# Altium PCB Kicker.PcbDoc
Units mm, origin at the board's own origin, x right, y up, seen from the top; angles counter-clockwise.
Board outline 172 x 133.17 mm, 2 copper layers (Top Layer, Bottom Layer), stack 1.671 mm thick; 52 components, 31 nets, 190 pads, 210 vias.
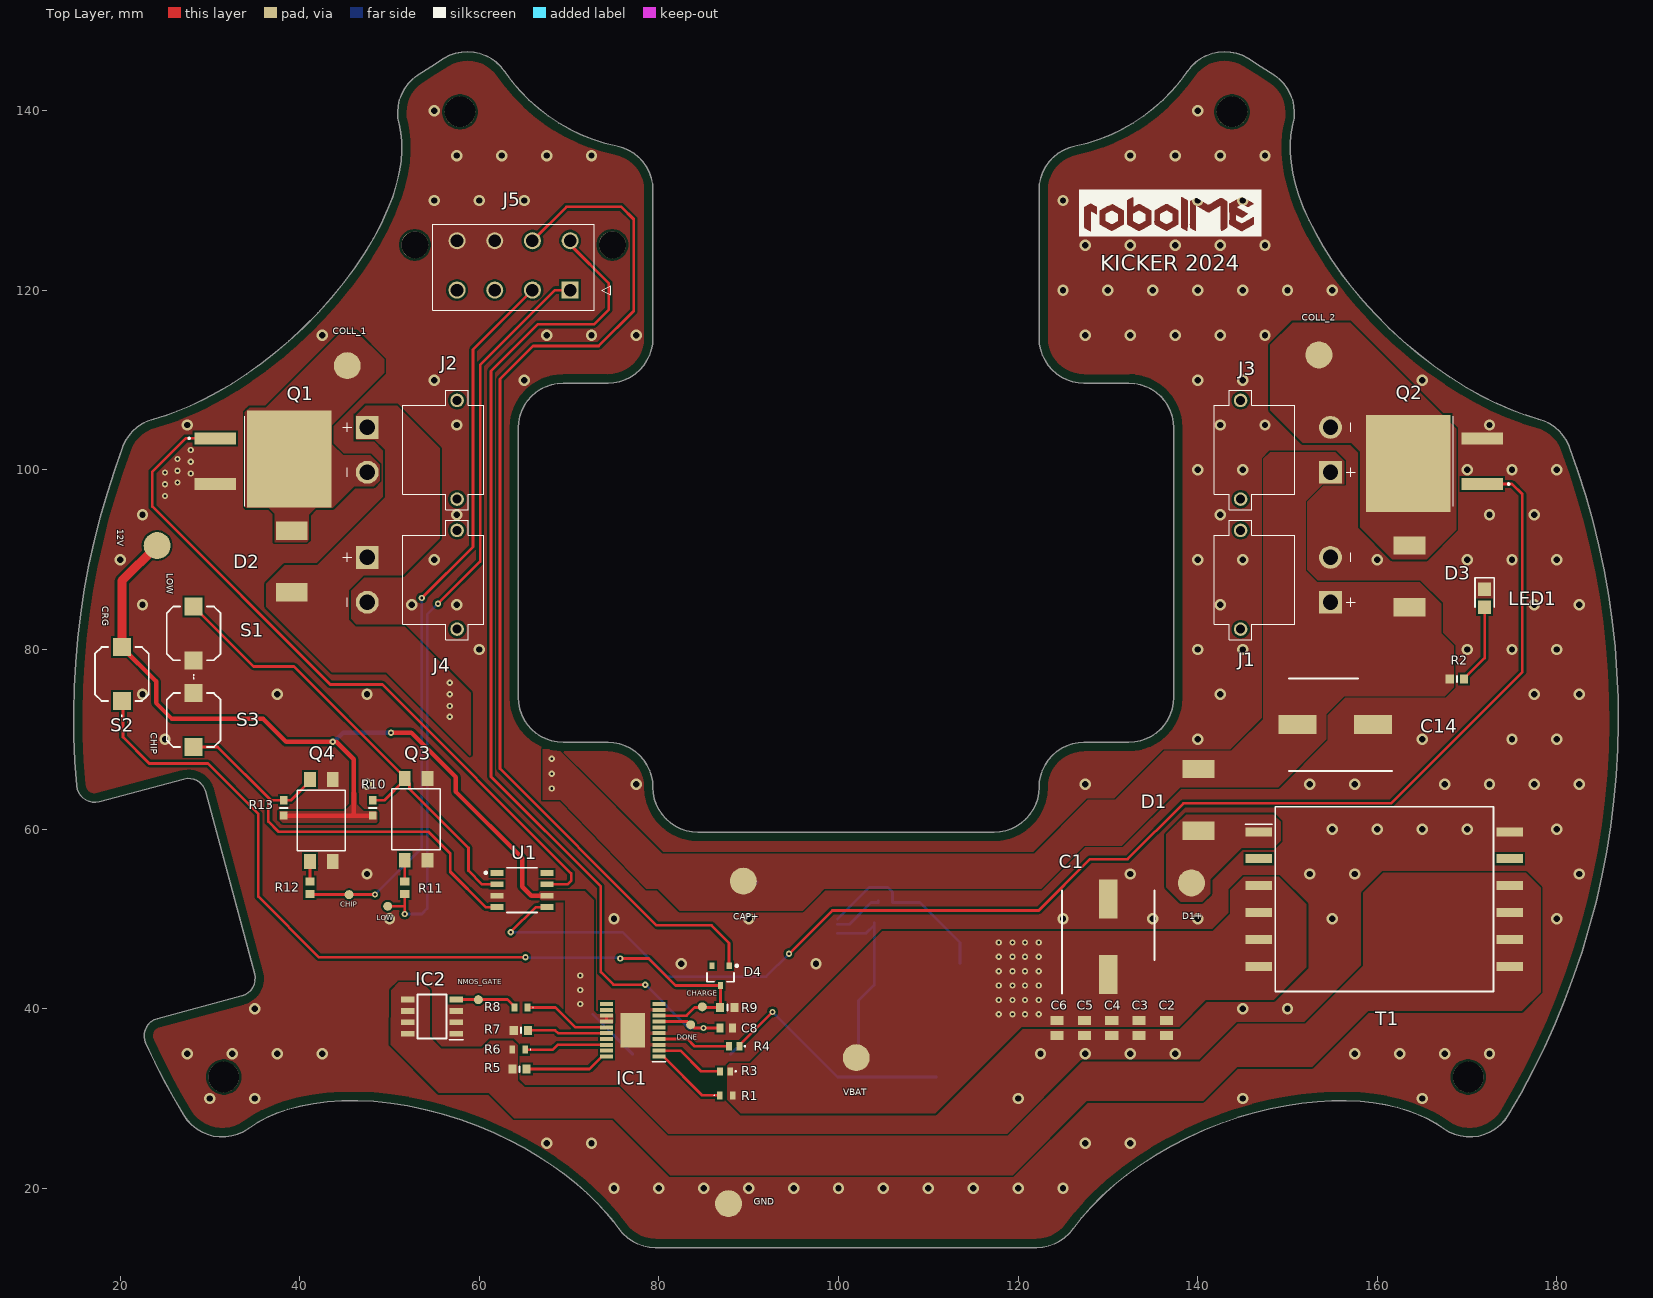
[diagram p0: Top Layer view]
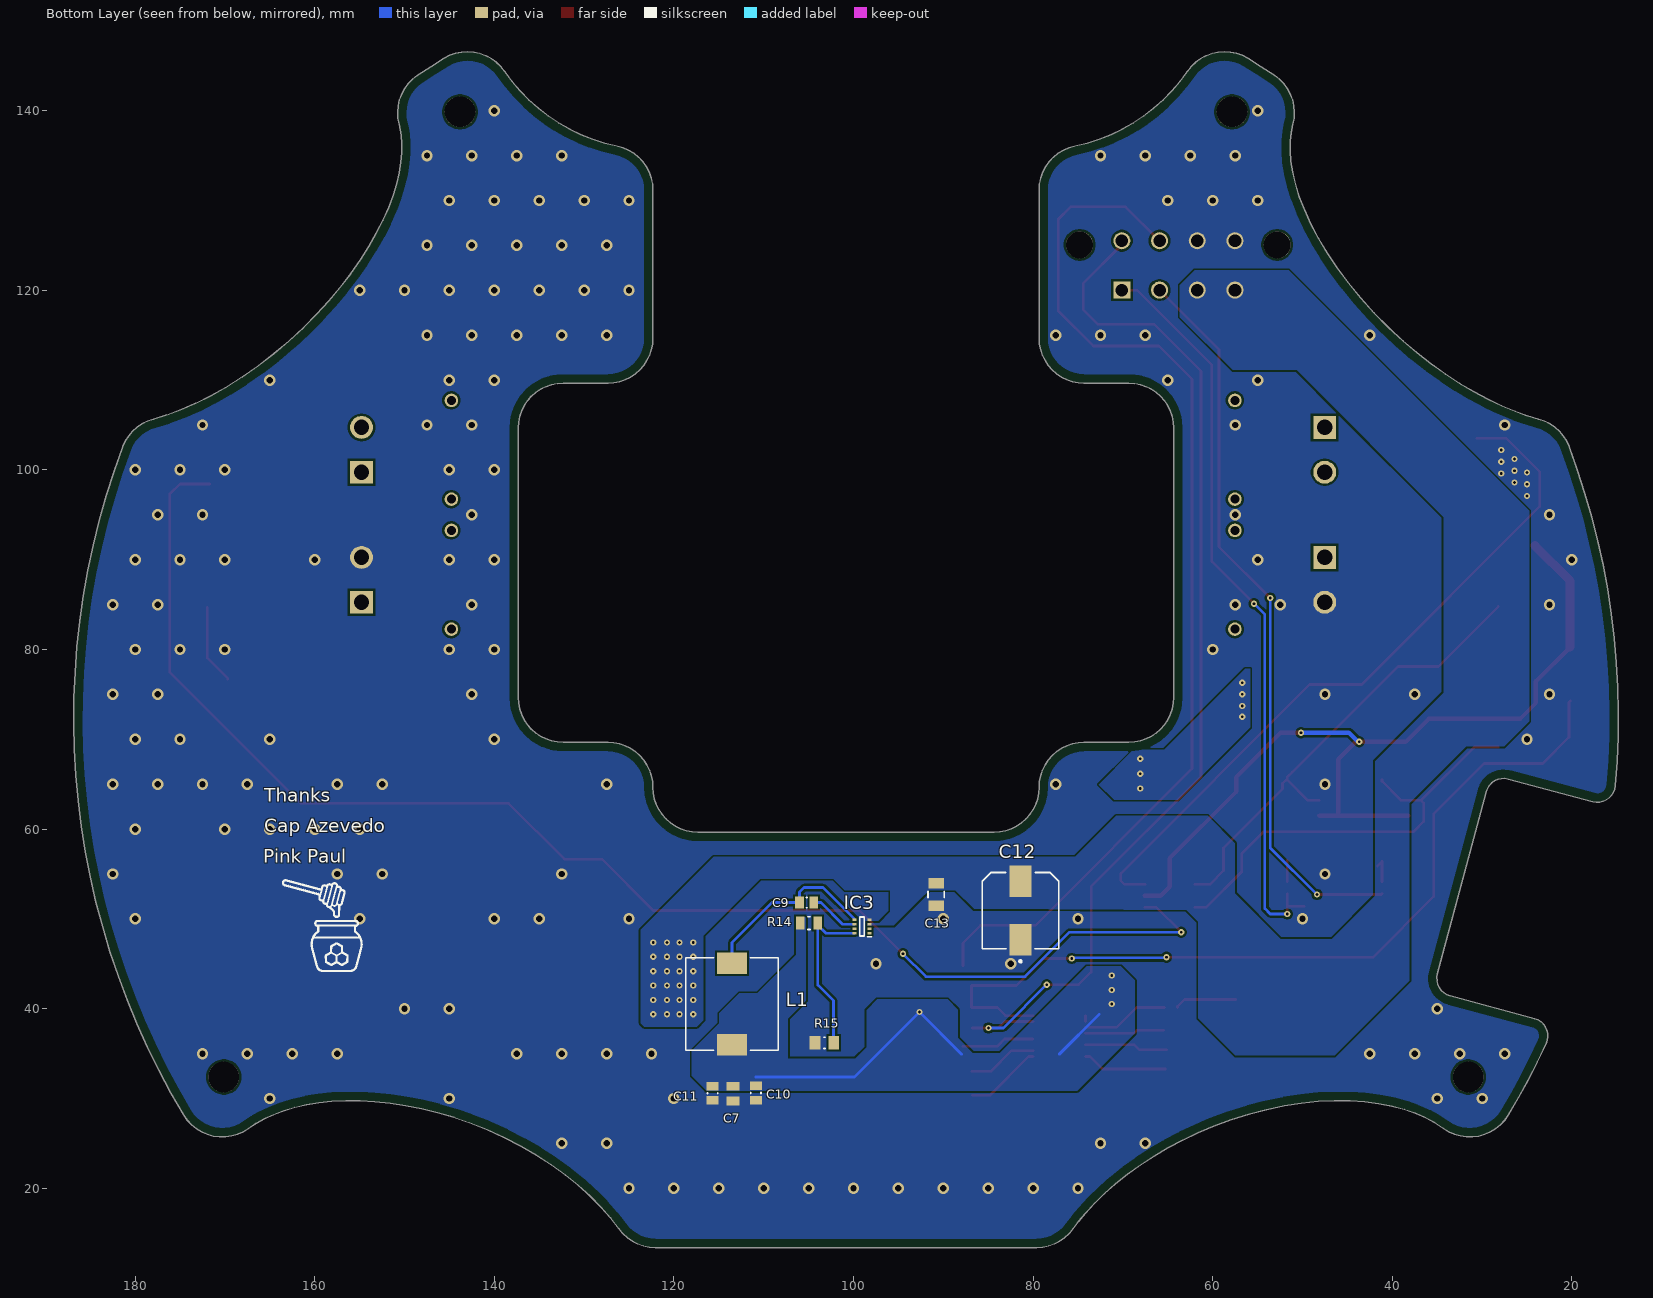
[diagram p1: Bottom Layer view, seen from below]
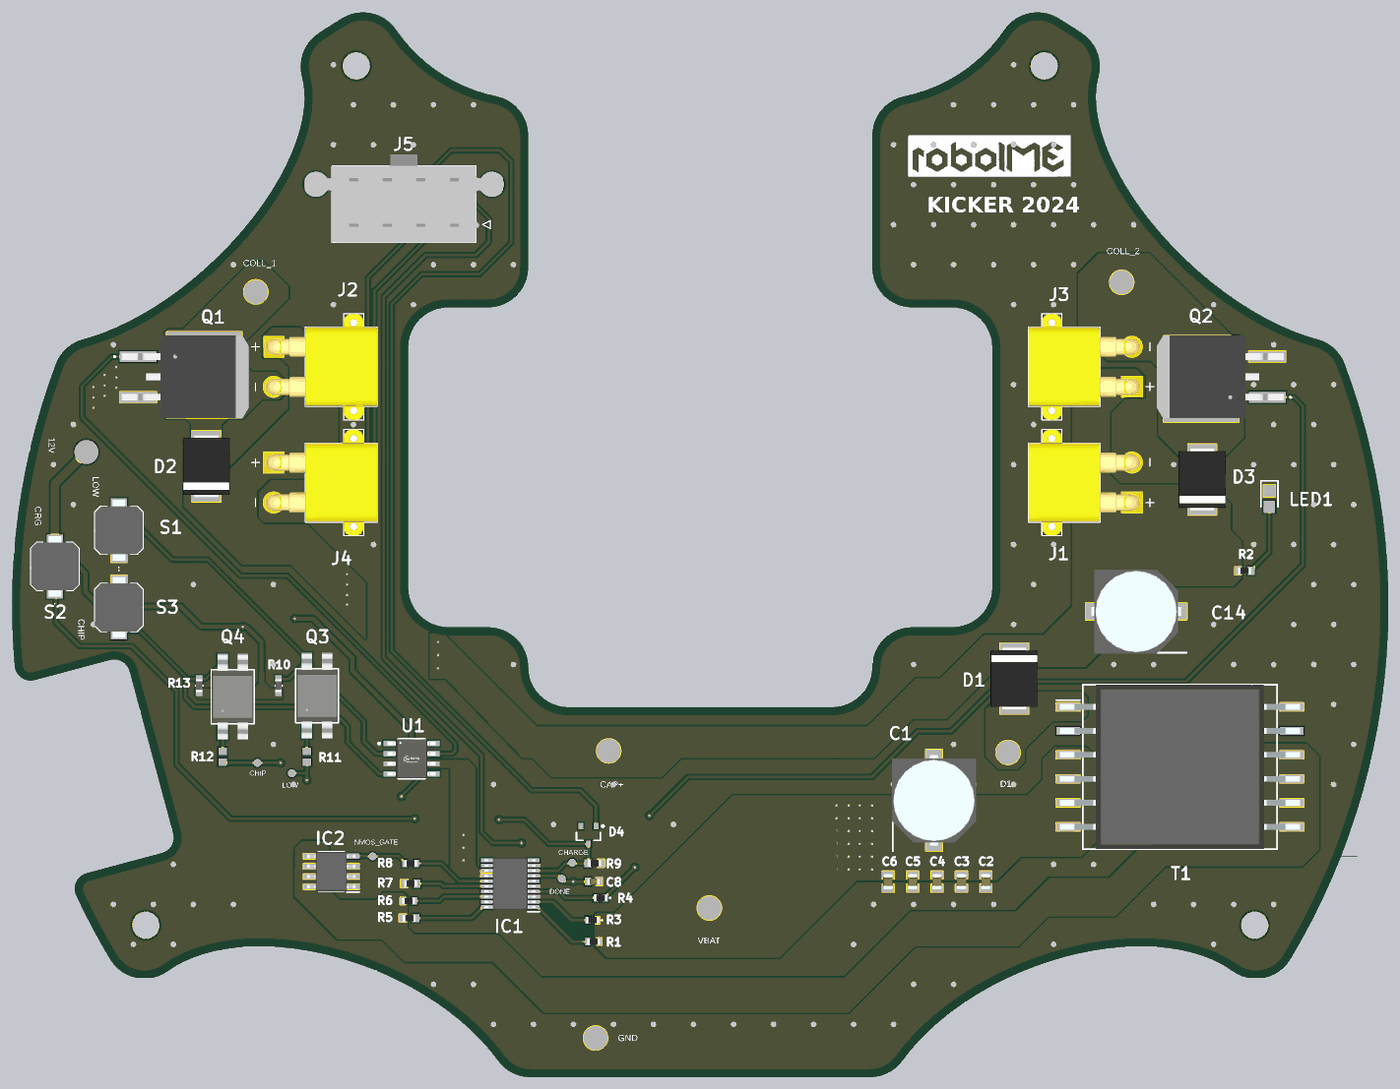
[diagram p2: 3D render of the assembled board from above, using the file's embedded part models]
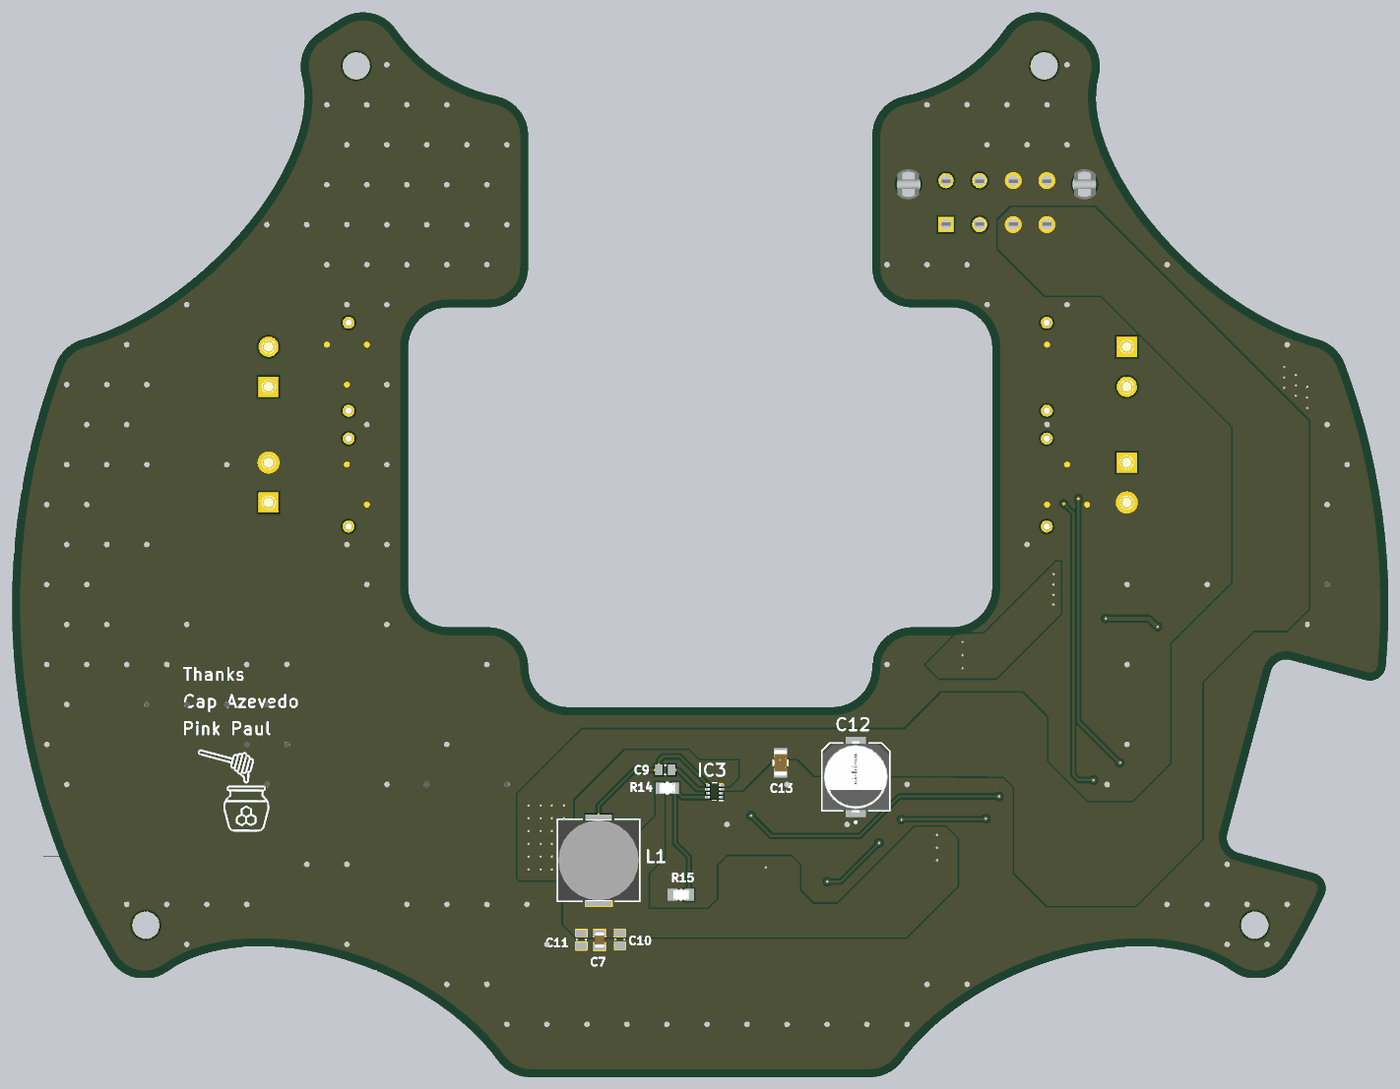
[diagram p3: 3D render of the assembled board from below, using the file's embedded part models]

## Layer stack, top to bottom
Top Solder: solder mask 0.0102, Solder Resist, Dk 3.5
Top Layer: signal copper 0.0356
Dielectric 1: dielectric 1.6, FR-4, Dk 4.8
Bottom Layer: signal copper 0.0356
Bottom Solder: solder mask 0.0102, Solder Resist, Dk 3.5

## Board outline
462 vertices, not listed, extent 14.84,13.39 186.835,146.562

## Design rules (kind name [scope] priority, off if disabled: settings)
BoardOutlineClearance [All] p1: gap=1 ignorepadtopadclearanceinfootprint=FALSE
Clearance Clearance_HV [InNetClass('HV')] p1: gap=1.5 ignorepadtopadclearanceinfootprint=FALSE except(0.2: Arc-SMDPad Track-SMDPad SMDPad-SMDPad SMDPad-Text)
Clearance Clearance_1 [OnMid vs OnMid] p2: gap=0.254 ignorepadtopadclearanceinfootprint=FALSE except(0.1: Arc-SMDPad Track-SMDPad SMDPad-SMDPad; 0.2: SMDPad-Fill SMDPad-Poly SMDPad-Region Fill-Fill Fill-Poly Fill-Region Poly-Poly Poly-Region Region-Region)
Clearance Clearance_2 [(ExistsOnLayer('Top Layer') Or ExistsOnLayer('Bottom Layer')) vs (ExistsOnLayer('Top Layer') Or ExistsOnLayer('Bottom Layer'))] p3: gap=0.254 ignorepadtopadclearanceinfootprint=FALSE except(0.1: Arc-SMDPad Track-SMDPad SMDPad-SMDPad; 0.2: SMDPad-Fill SMDPad-Poly SMDPad-Region Fill-Fill Fill-Poly Fill-Region Poly-Poly Poly-Region Region-Region)
Clearance [All] p4: gap=0.254 ignorepadtopadclearanceinfootprint=FALSE except(0.1: Arc-SMDPad Track-SMDPad SMDPad-SMDPad; 0.2: SMDPad-Fill SMDPad-Poly SMDPad-Region Fill-Fill Fill-Poly Fill-Region Poly-Poly Poly-Region Region-Region)
HoleSize [All] p1 off: absolutevalues=TRUE maxlimit=2.54 minlimit=0.025 maxpercent=80.000 minpercent=20.000
MinimumSolderMaskSliver [All] p1: minsoldermaskwidth=0.2
PlaneClearance [All] p1: clearance=0.3
PolygonConnect [All] p1: connectstyle=Direct reliefconductorwidth=0.254 reliefentries=4 polygonreliefangle="90 Angle" airgapwidth=0.254
RoutingVias [All] p1: holewidth=0.7 width=0.7 viastyle="Through Hole" minholewidth=0.3 minwidth=0.3 maxholewidth=5 maxwidth=1
SilkToSolderMaskClearance [IsPad] p1: minsilkscreentomaskgap=0.1 clearancetoexposedcopper=TRUE
SolderMaskExpansion SolderMaskExpansion_via [IsVia] p1: expansion=0.102 istentingtop=TRUE useseparateexpansions=TRUE expansionbottom=0.102 istentingbottom=TRUE
SolderMaskExpansion [All] p2: expansion=0.102 istentingtop=FALSE
Width [All] p1: maxlimit=5 minlimit=0.1 preferedwidth=0.3 minimp=50.000000 maximp=50.000000 favimp=50.000000
26 further rules are at their usual default settings.

## Components (designator, comment, footprint, x,y, rotation, side; value= is the part's Value field where it differs from the comment)
C1 "220uF" CAPAE1030X1050N 130.048,48.006 r90 top
C2 "10uF" CAPC2012X145N 136.525,37.846 r270 top
C3 "10uF" CAPC2012X145N 133.477,37.846 r270 top
C4 "10uF" CAPC2012X145N 130.429,37.846 r270 top
C5 "10uF" CAPC2012X145N 127.381,37.846 r270 top
C6 "10uF" CAPC2012X145N 124.333,37.846 r270 top
C7 "10uF" CAPC2012X145N 113.411,30.545 r90 bottom
C8 "100nF" CAPC1608X95N 87.503,37.846 r180 top
C9 "100nF" CAPC0805(2012)155_L 105.216,51.816 r180 bottom value=10uF
C10 "10uF" CAPC0805(2012)155_L 110.871,30.607 r90 bottom
C11 "4.7uF" CAPC0805(2012)155_L 115.697,30.585 r90 bottom value=10uF
C12 "UWT1H101MNL1GS" FP-UWT1H101MNL1GS-MFG 81.407,50.927 r90 bottom value=100uF
C13 "GMK316AB7106KL-TR" FP-1206-L_3_2_0_2-W_1_6_0-IPC_C 90.805,52.705 r270 bottom value=10uF
C14 "AEF1016220M250R" CAPAE1030X1700N 155.312,71.628 r180 top
D1 "ES3J" Diode 140.081,63.246 r270 top
D2 "ES3J" Diode 39.116,89.789 r90 top
D3 "ES3J" Diode 163.576,88.138 r90 top
D4 "BAS40" INF-SOT23_L 86.868,43.688 r270 top
IC1 "LT3751EFETRPBF" SOP65P640X120-21N 77.089,37.592 r180 top
IC2 "FDS2582" SOIC127P600X175-8N 54.737,39.116 r180 top
IC3 "TPS563300DRLR" SOTFL50P160X60-8N 99.06,49.149 r0 bottom
J1 "XT30PW-M" AMASS_XT30PW-M 144.78,87.757 r90 top
J2 "XT30PW-M" AMASS_XT30PW-M 57.531,102.235 r270 top
J3 "XT30PW-M" AMASS_XT30PW-M 144.78,102.235 r90 top
J4 "XT30PW-M" AMASS_XT30PW-M 57.531,87.757 r270 top
J5 "172447-0608" 172447-YY08 70.122,120.015 r0 top
L1 "SRU1048-120Y" INDP100100X51N 113.538,40.513 r270 bottom
LED1 "SM0805HCL" LEDC2012X105N 171.958,85.709 r270 top
Q1 "IKB40N65ES5ATMA1" BTS141TCBUMA1 35.687,100.965 r270 top
Q2 "IKB40N65ES5ATMA1" BTS141TCBUMA1 166.624,100.965 r90 top
Q3 "HCPL-817-300E" HCPL-817-300 52.959,61.087 r90 top
Q4 "HCPL-817-300E" HCPL-817-300 42.418,60.96 r90 top
R1 "24K9" ERJS03J155V 87.503,30.353 r0 top
R2 "100K" RESC1608X55N 168.872,76.708 r180 top
R3 "133k" ERJUP3 87.376,33.02 r180 top
R4 "133k" ERJUP3 88.392,35.814 r180 top
R5 "10K" RESC1608X55N 64.478,33.274 r180 top
R6 "24K9" ERJS03J155V 64.389,35.433 r180 top
R7 "1K" RESC1608X55N 64.643,37.592 r180 top
R8 "24K9" ERJS03J155V 64.643,40.132 r180 top
R9 "10K" RESC1608X55N 87.63,40.132 r180 top
R10 "RC0603FR-073K3L" FP-RC0603-0_55-MFG 48.133,62.357 r270 top value=3.3kΩ
R11 "CRCW0603442RFKEA" RESC1609X50X30ML10T20 51.689,53.467 r90 top
R12 "CRCW0603442RFKEA" RESC1609X50X30ML10T20 41.148,53.467 r90 top
R13 "RC0603FR-073K3L" FP-RC0603-0_55-MFG 38.227,62.357 r270 top value=3.3kΩ
R14 "140K" FP-CRCW0805-e3-MFG 104.943,49.53 r180 bottom value=30kR
R15 "10K" FP-CRCW0805-e3-IPC_A 103.251,36.195 r0 bottom value=10kR
S1 "430133050816" 430133050816 28.194,81.788 r90 top
S2 "430133050816" 430133050816 20.193,77.264 r90 top
S3 "430133050816" 430133050816 28.194,72.136 r270 top
T1 "DA2034-ALD" SOP300P3000X1143-12N 160.782,52.197 r0 top
U1 "IR4426SPBF" FP-PG-DSO-8-MFG 64.77,53.213 r0 top

## Footprints (in the part's own frame and the unit in brackets; to place one, negate y for a bottom-side part, rotate by r counter-clockwise, add the part's x,y. Pads: shape width x height; smd on the part's side, far side on the other; paste and mask are expansions set on the pad)
172447-YY08 [mm]
  rect 1.9x1.9 hole 1.4: 1(0,0)
  round 1.9 hole 1.4: 2(-4.2,0) 3(-8.4,0) 4(-12.6,0) 5(0,5.5) 6(-4.2,5.5) 7(-8.4,5.5) 8(-12.6,5.5)
  round 3 hole 3 unplated: 9(4.7,5.04) 10(-17.3,5.04)
  silkscreen extent -15.3,-2.25 4.5,7.35, body extent -18.69,-2.25 6.09,8.75, height 12.75
430133050816 [mm]
  rect 2x2 smd: 1(-3,0) 2(3,0)
  silkscreen extent -4.7,-3 3,3, body extent -3.8,-3 3.8,3, height 5.3
AMASS_XT30PW-M [mm]
  round 2.55 hole 1.7: N(2.5,-10)
  rect 2.55x2.55 / inner round 2.55 / far side rect 2.55x2.55 hole 1.7: P(-2.5,-10)
  round 1.508 hole 1: S1(5.5,0) S2(-5.5,0)
  silkscreen extent -6.65,-12.75 6.65,2.95, body extent -6.65,-11 6.65,2.95, height 5
BTS141TCBUMA1 [mm]
  rect 1.35x4.6 smd: 1(-2.54,-5.075) 3(2.54,-5.075)
  rect 10.8x9.4 smd: 2(-0.254,3.175)
  silkscreen extent -5,-8.1 5,-1.83, body extent -5.16,-7.14 5.16,8.74, height 4.57
CAPAE1030X1050N [mm]
  rect 4.3x2.05 smd: 1(-4.2,0) 2(4.2,0)
  silkscreen extent -6.35,-5.15 5.15,5.15, body extent -5.65,-5.25 5.65,5.25, height 10.5
CAPAE1030X1700N [mm]
  rect 4.25x2.1 smd: 1(-4.2,0) 2(4.2,0)
  silkscreen extent -6.32,-5.15 5.15,5.15, body extent -5.6,-5.25 5.6,5.25, height 17
CAPC0805(2012)155_L [mm] "Chip Capacitor, Body 2.0x1.2mm, Height 1.55mm, IPC High Density"
  rect 0.95x1.35 smd: 1(-0.8,0) 2(0.8,0)
  silkscreen extent -0.05,-0.58 0.05,0.58, body extent -1.1,-0.72 1.1,0.72, height 1.55
CAPC1608X95N [mm]
  rect 0.78x0.98 smd: 1(-0.7,0) 2(0.7,0)
  body extent -0.8,-0.4 0.8,0.4, height 0.95
CAPC2012X145N [mm]
  rect 0.97x1.47 smd: 1(-0.83,0) 2(0.83,0)
  body extent -1,-0.63 1,0.63, height 1.45
Diode [mil]
  rect 80x140 smd: D1+(-135,0) D1-(135,0)
  body extent -154,-116 154,116, height 95
ERJS03J155V [mm]
  rect 0.65x0.9 smd: 1(-0.725,0) 2(0.725,0)
  silkscreen extent -1.35,-0.02 -1.3,0.02, body extent -0.8,-0.4 0.8,0.4, height 0.45
ERJUP3 [mm]
  rect 0.65x0.9 smd: 1(-0.575,0) 2(0.575,0)
  silkscreen extent -1.22,-0.05 -1.13,0.05, body extent -0.8,-0.4 0.8,0.4, height 0.55
FP-1206-L_3_2_0_2-W_1_6_0-IPC_C [mm]
  rect 1.204x1.706 smd paste+0 mask+0: 1(-1.251,0) 2(1.251,0)
  silkscreen extent -0.35,-0.9 0.35,0.9, body extent -1.6,-0.8 1.6,0.8, height 1.8
FP-CRCW0805-e3-IPC_A [mil]
  rect 47.5x59.38 smd paste+0 mask+0: 1(-41.37,0) 2(41.37,0)
  silkscreen extent -3,-25 3,25, body extent -39,-25 39,25, height 20
FP-CRCW0805-e3-MFG [mm]
  rect 0.95x1.45 smd paste+0 mask+0: 1(-0.975,0) 2(0.975,0)
  silkscreen extent -0.13,-0.7 0.13,0.7, body extent -1,-0.63 1,0.63, height 0.5
FP-PG-DSO-8-MFG [mm]
  rect 1.45x0.65 smd paste+0 mask+0: 1(-2.775,1.905) 2(-2.775,0.635) 3(-2.775,-0.635) 4(-2.775,-1.905) 5(2.775,-1.905) 6(2.775,-0.635) 7(2.775,0.635) 8(2.775,1.905)
  silkscreen extent -4.17,-2.49 1.67,2.49, body extent -3.6,-2.59 3.6,2.59, height 0.25
FP-RC0603-0_55-MFG [mm]
  rect 0.9x0.8 smd paste+0 mask+0: 1(-0.85,0) 2(0.85,0)
  silkscreen extent 0,-0.45 0,0.45, body extent -1.4,-0.55 1.4,0.55, height 0.25
FP-UWT1H101MNL1GS-MFG [mm]
  rect 3.5x2.5 smd paste+0 mask+0: 1(-3.25,0) 2(3.25,0)
  silkscreen extent -5.77,-4.25 4.25,4.25, body extent -4.45,-4.15 4.45,4.15, height 10.51
HCPL-817-300 [mil]
  rect 65x51 smd paste+0 mask+0: 1(-179.5,50) 2(-179.5,-50) 3(179.5,-50) 4(179.5,50)
  silkscreen extent -133,-106 133,106, body extent -206,-101 206,101, height 171
INDP100100X51N [mm] "Precision Wire Wound Inductor, 2-Leads, Body 10.00x10.00mm, IPC Medium Density"
  rect 2.4x3.3 smd: 1(-4.55,0) 2(4.55,0)
  silkscreen extent -5.15,-5.15 5.15,5.15, body extent -5.1,-5 5.1,5, height 5.2
INF-SOT23_L [mm] "SOT23, 3-Leads, Body 2.9x1.3 mm, Pitch 0.95 mm, IPC High Density"
  rect 0.75x0.6 smd: 1(-1.1,0.95) 2(-1.1,-0.95) 3(1.1,0)
  silkscreen extent -1.22,-1.5 0.7,1.93, body extent -0.7,-1.5 0.7,1.5, height 1.1
LEDC2012X105N [mm]
  rect 1.5x1.45 smd: 1(-1,0) 2(1,0)
  silkscreen extent -2.29,-1.07 1,1.07, body extent -1.65,-0.6 1.65,0.6
RESC1608X55N [mm]
  rect 0.9x1 smd: 1(-0.8,0) 2(0.8,0)
  silkscreen extent 0,-0.33 0,0.33, body extent -0.8,-0.43 0.8,0.43, height 0.55
RESC1609X50X30ML10T20 [mm] "Chip Resistor, 2-Leads, Body 1.55x0.85mm, IPC Low Density"
  rect 0.9x1.05 smd: 1(-0.675,0) 2(0.675,0)
  body extent -0.82,-0.48 0.82,0.48, height 0.5
SOIC127P600X175-8N [mm]
  rect 1.525x0.65 smd: 1(-2.712,1.905) 2(-2.712,0.635) 3(-2.712,-0.635) 4(-2.712,-1.905) 5(2.712,-1.905) 6(2.712,-0.635) 7(2.712,0.635) 8(2.712,1.905)
  silkscreen extent -3.48,-2.45 1.6,2.58, body extent -3,-2.45 3,2.45, height 1.75
SOP65P640X120-21N [mm]
  rect 1.45x0.45 smd: 1(-2.925,2.925) 2(-2.925,2.275) 3(-2.925,1.625) 4(-2.925,0.975) 5(-2.925,0.325) 6(-2.925,-0.325) 7(-2.925,-0.975) 8(-2.925,-1.625) 9(-2.925,-2.275) 10(-2.925,-2.925) 11(2.925,-2.925) 12(2.925,-2.275) 13(2.925,-1.625) 14(2.925,-0.975) 15(2.925,-0.325) 16(2.925,0.325) 17(2.925,0.975) 18(2.925,1.625) 19(2.925,2.275) 20(2.925,2.925)
  rect 2.74x3.86 smd: 21(0,0)
  silkscreen extent -3.65,3.5 -2.2,3.5, body extent -3.2,-3.25 3.2,3.25, height 1.2
SOP300P3000X1143-12N [mm]
  rect 2.95x1 smd: 1(-13.975,7.5) 2(-13.975,4.5) 3(-13.975,1.5) 4(-13.975,-1.5) 5(-13.975,-4.5) 6(-13.975,-7.5) 7(13.975,-7.5) 8(13.975,-4.5) 9(13.975,-1.5) 10(13.975,1.5) 11(13.975,4.5) 12(13.975,7.5)
  silkscreen extent -15.45,-10.29 12.15,10.29, body extent -15,-10.29 15,10.29, height 11.43
SOTFL50P160X60-8N [mm]
  rect 0.475x0.3 smd: 1(-0.838,0.75) 2(-0.838,0.25) 3(-0.838,-0.25) 4(-0.838,-0.75) 5(0.838,-0.75) 6(0.838,-0.25) 7(0.838,0.25) 8(0.838,0.75)
  silkscreen extent -1.07,-1.05 0.25,1.15, body extent -0.8,-1.05 0.8,1.05, height 0.6

## Part data
C1: library part 865080657018, "Capacitor Polarised", Manufacturer_Name="Wurth Elektronik", Mouser Part Number=710-865080657018, Datasheet Link=https://www.we-online.com/catalog/datasheet/865080657018.pdf, Height=10.5mm, Manufacturer_Part_Number=865080657018, Mouser Price/Stock=https://www.mouser.co.uk/ProductDetail/Wurth-Elektronik/865080657018?qs=0KOYDY2FL28CcgHzg1XTuA%3D%3D
C2 C3 C4 C5 C6 C7: library part GRM21BR61H106KE43L, "Capacitor 10u", Manufacturer_Name="Murata Electronics", Mouser Part Number=81-GRM21BR61H106KE3L, Arrow Part Number=GRM21BR61H106KE43L, Arrow Price/Stock=https://www.arrow.com/en/products/grm21br61h106ke43l/murata-manufacturing?region=europe, Datasheet Link=http://www.murata.com/~/media/webrenewal/support/library/catalog/products/capacitor/mlcc/c02e.pdf, Height=1.45mm, Manufacturer_Part_Number=GRM21BR61H106KE43L, Mouser Price/Stock=https://www.mouser.co.uk/ProductDetail/Murata-Electronics/GRM21BR61H106KE43L?qs=lYGu3FyN48cBZlIduWKclg%3D%3D
C8: library part C0603C104K1RACAUTO, "Capacitor", Manufacturer_Name=KEMET, Mouser Part Number=80-C0603C104K1RAUTO, Arrow Part Number=C0603C104K1RACAUTO, Arrow Price/Stock=https://www.arrow.com/en/products/c0603c104k1racauto/kemet-corporation?region=europe, Datasheet Link=https://connect.kemet.com:7667/gateway/IntelliData-ComponentDocumentation/1.0/download/specsheet/C0603C104K1RACAUTO, Height=0.95mm, Manufacturer_Part_Number=C0603C104K1RACAUTO, Mouser Price/Stock=https://www.mouser.co.uk/ProductDetail/KEMET/C0603C104K1RACAUTO?qs=3Rah4i%252BhyCGTQ5uPNXtfZA%3D%3D
C9 C10 C11: library part CMP-1036-04916-1, "CAP 10uF 6.3V ±10% 0805 (2012 Metric) Thickness 1.55mm SMD", Case-EIA=0805, Case-Metric=2012, Rated Voltage="6.3 V", Tolerance=Â±10%, Max Thickness="1.55 mm", Technology=SMT
C12: library part CMP-2000-07373-2, "CAP ALUM 100UF 20% 50V SMD", Capacitance=100uF, Case/Package=Radial, Dielectric Material=Aluminium, Leakage Current=3uA, Max Operating Temperature=105°C, Min Operating Temperature=-55°C, Package Quantity=500, Ripple Current=140mA, Tolerance=20%, Voltage=50V, Construction=Cylindrical, Diameter=8mm, Dissipation Factor=0.14%, Height=10mm, Height - Seated (Max)=0.413inch, Lead Free="Lead Free", Length=10mm, Life (Hours)=1000Hour, Mount="Surface Mount", Number of Pins=2, Packaging="Tape and Reel", Radiation Hardening=No, REACH SVHC="No SVHC", Ripple Current (AC)=140mA, RoHS Compliant=Yes, Series=WT, Termination=SMD/SMT, Voltage Rating=50V, Voltage Rating (DC)=50V
C13: library part CMP-2000-06324-3, "None", Capacitance=10uF, Case Code (Imperial)=1206, Case Code (Metric)=3216, Dielectric=X7R, Max Operating Temperature=125°C, Min Operating Temperature=-55°C, Package Quantity=2000, Resistor Type=Ceramic, Tolerance=10%, Voltage Rating=35V, Case/Package=1206, Height=1.6mm, Length=0.126inch, Mount="Surface Mount", Packaging="Tape and Reel", REACH SVHC="No SVHC", RoHS Compliant=Yes, Series=M, Termination=SMD/SMT, Thickness=0.071inch, Voltage Rating (DC)=35V, Width=1.6mm
C14: "Capacitor", Manufacturer_Name=KYOCERA, Mouser Part Number=581-AEF1016220M250R, Datasheet Link=https://hu.mouser.com/datasheet/2/40/kyocera_avx_aef_series-2933561.pdf, Height=17mm, Manufacturer_Part_Number=AEF1016220M250R, Mouser Price/Stock=https://www.mouser.co.uk/ProductDetail/KYOCERA-AVX/AEF1016220M250R?qs=MyNHzdoqoQJxz8ZnBhkLWA%3D%3D
D4: library part CMP-1182-00023-1, "Silicon Schottky Diode, -55 to 150 degC, SOT23, Reel, Green", Manufacturer=Infineon, ComponentLink1Description="Manufacturer URL", ComponentLink1URL=http://www.infineon.com/, ComponentLink2Description=Datasheet, ComponentLink2URL=http://www.infineon.com/dgdl/bas40_bas140series.pdf?folderId=db3a30431400ef68011425f1ca2505e3&fileId=db3a304314dca389011518a57ed20e11, ComponentLink3Description="Package Specification", ComponentLink3URL=http://www.infineon.com/dgdl/SOT23-Package_Overview.pdf?folderId=db3a30431936bc4b0119532290053c66&fileId=db3a30431936bc4b0119533468123c85, Configuration=Single, CT (max)="5Â pF", Green=TRUE, IF (max)="120Â mA", Mounting Technology="Surface Mount", PackageDescription="3-Pin Small Outline Transistor Package, 1.3 x 2.9 mm Body, 0.95 mm Pitch", PackageReference=SOT23, PackageVersion=Apr-08, Packing=Reel, PartNumber=BAS40, VF (max)="1,000Â mV", VR (max)="40Â V"
IC1: "Integrated Circuit", Manufacturer_Name="Analog Devices", Datasheet Link=https://www.mouser.in/datasheet/2/609/3751fd-1269554.pdf, Height=1.2mm, Manufacturer_Part_Number=LT3751EFETRPBF
IC2: "Integrated Circuit", Manufacturer_Name=onsemi, Mouser Part Number=512-FDS2582, Arrow Part Number=FDS2582, Arrow Price/Stock=https://www.arrow.com/en/products/fds2582/on-semiconductor, Datasheet Link=https://www.onsemi.com/pub/Collateral/FDS2582-D.pdf, Height=1.75mm, Manufacturer_Part_Number=FDS2582, Mouser Price/Stock=https://www.mouser.co.uk/ProductDetail/ON-Semiconductor-Fairchild/FDS2582/?qs=9%2FFjV4%2Fi8epQRusZUcRtHQ%3D%3D
IC3: "Integrated Circuit", Manufacturer_Name="Texas Instruments", Mouser Part Number=595-TPS563300DRLR, Datasheet Link=https://www.ti.com/lit/ds/symlink/tps563300.pdf?ts=1666035990155&ref_url=https%253A%252F%252Fwww.ti.com%252Fproduct%252FTPS563300, Height=0.6mm, Manufacturer_Part_Number=TPS563300DRLR, Mouser Price/Stock=https://www.mouser.co.uk/ProductDetail/Texas-Instruments/TPS563300DRLR?qs=vvQtp7zwQdMDxJAw0dSlAg%3D%3D
J1 J2 J3 J4: "Socket; DC supply; XT30; male; PIN: 2; on PCBs; THT; Colour: yellow", Package=None, Availability="Not in stock", Check_prices=https://www.snapeda.com/parts/XT30PW-M/AMASS/view-part/?ref=eda, MF=AMASS, MP=XT30PW-M, Price=None, SnapEDA_Link=https://www.snapeda.com/parts/XT30PW-M/AMASS/view-part/?ref=snap
J5: "Connector", Manufacturer_Name=Molex, Mouser Part Number=538-172447-0608, Datasheet Link=https://www.molex.com/pdm_docs/sd/1724470406_sd.pdf, Height=12.8mm, Manufacturer_Part_Number=172447-0608, Mouser Price/Stock=https://www.mouser.co.uk/ProductDetail/Molex/172447-0608?qs=t7xnP681wgUaroQMnMhOkA%3D%3D
L1: "Inductor 12uH 4A", Arrow Part Number=CLF7045T-4R7N-D, Manufacturer_Name=TDK, Mouser Part Number=810-CLF7045T-4R7N-D, Arrow Price/Stock=https://www.arrow.com/en/products/clf7045t-4r7n-d/tdk, Datasheet Link=https://product.tdk.com/system/files/dam/doc/product/inductor/inductor/smd/wdcatalog/withdrawn_inductor_commercial_power_clf7045_en.pdf, Height=4.8mm, Manufacturer_Part_Number=CLF7045T-4R7N-D, Mouser Price/Stock=https://www.mouser.co.uk/ProductDetail/TDK/CLF7045T-4R7N-D?qs=ilIqL0%2F%2FoDU8gjMEHwFGUQ%3D%3D
LED1: "LED", Manufacturer_Name=Bivar, Mouser Part Number=749-SM0805HCL, Arrow Part Number=SM0805HCL, Arrow Price/Stock=https://www.arrow.com/en/products/sm0805hcl/bivar?region=nac, Datasheet Link=https://datasheet.datasheetarchive.com/originals/distributors/Datasheets-28/DSA-548818.pdf, Height=1.054mm, Manufacturer_Part_Number=SM0805HCL, Mouser Price/Stock=https://www.mouser.co.uk/ProductDetail/Bivar/SM0805HCL?qs=jaLxTFIJCiunRhy8mE7Amw%3D%3D
Q1 Q2: "Transistor IGBT", Manufacturer_Name=Infineon, Mouser Part Number=726-IKB40N65ES5ATMA1, Arrow Part Number=IKB40N65ES5ATMA1, Arrow Price/Stock=https://www.arrow.com/en/products/ikb40n65es5atma1/infineon-technologies-ag?region=nac, Datasheet Link=https://componentsearchengine.com/Datasheets/1/IKB40N65ES5ATMA1.pdf, Height=4.4mm, Manufacturer_Part_Number=IKB40N65ES5ATMA1, Mouser Price/Stock=https://www.mouser.co.uk/ProductDetail/Infineon-Technologies/IKB40N65ES5ATMA1?qs=MLItCLRbWsxz7jtfFbVz2w%3D%3D
R1 R6 R8: library part ERJ-U03F2492V, "Resistor", Manufacturer_Name=Panasonic, Mouser Part Number=667-ERJ-U03F2492V, Datasheet Link=http://industrial.panasonic.com/cdbs/www-data/pdf/RDP0000/AOA0000C334.pdf, Height=0.55mm, Manufacturer_Part_Number=ERJ-U03F2492V, Mouser Price/Stock=https://www.mouser.co.uk/ProductDetail/Panasonic/ERJ-U03F2492V?qs=pdFhdcvjjggoxhbYOGQCqA%3D%3D
R2: library part CPF0603F100KC1, "Resistor", Manufacturer_Name="TE Connectivity", Mouser Part Number=279-CPF0603F100KC1, Arrow Part Number=CPF0603F100KC1, Arrow Price/Stock=https://www.arrow.com/en/products/cpf0603f100kc1/te-connectivity?region=nac, Datasheet Link=http://www.farnell.com/datasheets/1786775.pdf, Height=0.55mm, Manufacturer_Part_Number=CPF0603F100KC1, Mouser Price/Stock=https://www.mouser.co.uk/ProductDetail/TE-Connectivity-Holsworthy/CPF0603F100KC1?qs=n4i9pByFsMRwvDu9p24AYA%3D%3D
R3 R4: library part ERJ-UP3F1333V, "Resistor", Manufacturer_Name=Panasonic, Mouser Part Number=667-ERJ-UP3F1333V, Datasheet Link=https://industrial.panasonic.com/cdbs/www-data/pdf/RDP0000/AOA0000C337.pdf, Height=0.55mm, Manufacturer_Part_Number=ERJ-UP3F1333V, Mouser Price/Stock=https://www.mouser.co.uk/ProductDetail/Panasonic/ERJ-UP3F1333V?qs=GedFDFLaBXHzgPg3lbsA%252Bw%3D%3D
R5 R9: library part ERJ-U3RD1002V, "Resistor", Manufacturer_Name=Panasonic, Mouser Part Number=667-ERJ-U3RD1002V, Arrow Part Number=ERJ-U3RD1002V, Arrow Price/Stock=https://www.arrow.com/en/products/erj-u3rd1002v/panasonic?region=nac, Datasheet Link=https://industrial.panasonic.com/cdbs/www-data/pdf/RDP0000/RDP0000C343.pdf, Height=0.55mm, Manufacturer_Part_Number=ERJ-U3RD1002V, Mouser Price/Stock=https://www.mouser.co.uk/ProductDetail/Panasonic/ERJ-U3RD1002V?qs=TiOZkKH1s2Rg0qUjKdWcPw%3D%3D
R7: library part CHP0603QFX-1001ELF, "Resistor", Manufacturer_Name=Bourns, Mouser Part Number=652-CHP0603QFX-1001E, Arrow Part Number=CHP0603QFX-1001ELF, Arrow Price/Stock=https://www.arrow.com/en/products/chp0603qfx-1001elf/bourns?region=nac, Datasheet Link=http://www.bourns.com/docs/Product-Datasheets/CHP-Q.pdf, Height=0.55mm, Manufacturer_Part_Number=CHP0603QFX-1001ELF, Mouser Price/Stock=https://www.mouser.co.uk/ProductDetail/Bourns/CHP0603QFX-1001ELF?qs=8Wlm6%252BaMh8TVmVuLViesjw%3D%3D
R10 R13: library part CMP-1012-00567-3, Case Code (Imperial)=0603, Max Operating Temperature=155°C, Max Power Dissipation=100mW, Min Operating Temperature=-55°C, Resistance=3.3kΩ, Temperature Coefficient=100ppm/°C, Tolerance=1%, Voltage Rating=50V, Case Code (Metric)=0603, Case/Package=0603, Composition="Thick Film", Depth=800µm, Features="Moisture Resistant", Height=450µm, Lead Free="Lead Free", Length=1.6mm, Military Standard=Not, Mount="Surface Mount", NexarPartId=40011875, Number of Pins=2, Number of Terminations=2, Packaging="Tape & Reel", Power Rating=100mW, REACH SVHC="No SVHC", RoHS=Compliant, Schedule B="8533210045, 8533210045", Termination=SMD/SMT, Voltage Rating (AC)=50V, Voltage Rating (DC)=50V, Width=800µm
R11 R12: library part CMP-1012-00470-2, Manufacturer="Vishay Dale", Part Number=CRCW0603442RFKEA
R14: library part CMP-2001-03804-2, "RES Thick Film, 30kΩ, 1%, 0.125W, 100ppm/°C, 0805", Case Code (Imperial)=0805, Case Code (Metric)=2012, Max Operating Temperature=155°C, Max Power Dissipation=125mW, Min Operating Temperature=-55°C, Package Quantity=10, Resistance=30kR, Temperature Coefficient=100ppm/°C, Tolerance=1%, Voltage Rating=150V, Case/Package=0805, Composition="Thick Film", Contact Plating=Tin, Depth=1.25mm, Features="Automotive AEC-Q200", Height=0.45mm, Lead Free="Lead Free", Length=2mm, Military Standard=Not, Mount="Surface Mount", Number of Pins=2, Number of Terminations=2, Packaging="Tape and Reel", Power Rating=125mW, Radiation Hardening=No, Termination=SMD/SMT, Voltage Rating (DC)=150V, Weight=0.000194oz, Width=0.049inch
R15: library part CMP-2001-04908-2, "RES Thick Film, 10kΩ, 1%, 0.125W, 100ppm/°C, 0805", Case Code (Imperial)=0805, Case Code (Metric)=2012, Max Operating Temperature=155°C, Min Operating Temperature=-55°C, Package Quantity=5000, Power Rating=125mW, Resistance=10kR, Temperature Coefficient=100ppm/°C, Tolerance=1%, Voltage Rating=150V, Case/Package=0805, Composition="Thick Film", Contact Plating=Tin, Depth=1.25mm, Height=0.45mm, Lead Free="Lead Free", Length=2mm, Military Standard=Not, Packaging="Tape and Reel", Radiation Hardening=No, Termination=SMD/SMT, Voltage Rating (DC)=150V, Weight=0.000194oz, Width=1.25mm
S1 S2 S3: "Switch", Manufacturer_Name="Wurth Elektronik", Mouser Part Number=710-430133050816, Datasheet Link=https://www.we-online.com/components/products/datasheet/430133050816.pdf, Height=5.2mm, Manufacturer_Part_Number=430133050816, Mouser Price/Stock=https://www.mouser.co.uk/ProductDetail/Wurth-Elektronik/430133050816?qs=ufv2HEpFn%252BRy3i84BABEDg%3D%3D
T1: "Transformer", Manufacturer_Name=COILCRAFT, Mouser Part Number=994-DA2034-ALD, Datasheet Link=https://www.coilcraft.com/pdfs/da2032.pdf, Height=11.43mm, Manufacturer_Part_Number=DA2034-ALD, Mouser Price/Stock=https://www.mouser.co.uk/ProductDetail/Coilcraft/DA2034-ALD?qs=ZYnrCdKdyedtN304hL7iMg%3D%3D
U1: library part CMP-32851-000176-1, "IC GATE DRVR LOW-SIDE 8SOIC", Case/Package=SOIC, Max Operating Temperature=150°C, Max Output Current=3.3A, Max Supply Voltage=20V, Min Operating Temperature=-40°C, Min Supply Voltage=6V, Package Quantity=95, Channel Type=Independent, Fall Time=25ns, Halogen Free="Not Halogen Free", Height=0.059inch, Lead Free="Lead Free", Length=0.196inch, Mount="Surface Mount", Number of Channels=2, Number of Drivers=2, Number of Outputs=2, Number of Pins=8, Output Current=3.3A, Packaging=Rail/Tube, Propagation Delay=85ns, Reach SVHC Compliant=Yes, RoHS Compliant=Yes, Series=-, Width=0.157inch
Q3 Q4: Manufacturer_Part_Number=HCPL-817-300E

## Free pads (board coordinates)
  round 3.4 hole 3.4: 1(31.556,32.39) 1(57.854,139.861) 1(143.822,139.861) 1(170.12,32.39)
  round 3 smd: 12V(24.13,91.567) 12V(45.3,111.6) 12V(139.3,54) 12V(153.5,112.8) ""(87.757,18.288) ""(89.4,54.2) ""(101.981,34.544)
  round 1 smd: ""(45.5,52.7) ""(49.8,51.4) ""(59.9,41) ""(83.541,38.207) ""(84.841,40.207)

## Via types
v1: diameter 1.27/1.27 (per signal layer), hole 0.711, Top Layer to Bottom Layer, tented both sides, 154 vias
v2: diameter 0.7, hole 0.3, Top Layer to Bottom Layer, tented both sides, 56 vias

## Nets (pads, with @x,y where several pads share a name; then routed paths per layer and width w, separated by ;. In a path a pad name is that pad's centre, name@x,y a point inside that pad or via, vN(x,y) a via of type N, cw(c..) or ccw(c..) an arc to the next point about the centre after c; other vN are vias at no path point)
12V: C7.2 C10.2 C11.2 IC1.13 IC1.14 L1.2 pad.12V@24.13,91.567 R4.1 R10.2 R13.2 R14.1 S2.2 U1.6 | length 136.3
  Top Layer w0.3: IC1.14 IC1.13 ; R4.1 88.967,35.939 v2(92.652,39.624)
  Top Layer w0.5: S2.2 24.003,76.454 24.003,74.041 25.781,72.263 35.941,72.263 38.481,69.723 v2(43.688,69.723) 44.069,69.723 46.013,67.779 46.013,61.507 ; R13.2 46.013,61.507 ; R10.2 46.013,61.507 ; v2(50.165,70.739) 50.169,70.743 52.447,70.743 57.404,65.786 57.404,64.135 64.77,56.769 64.77,53.594 65.786,52.578 U1.6
  Top Layer w1: S2.2 20.193,87.63 pad.12V@24.13,91.567
  Bottom Layer w0.3: 72.644,39.37 77.089,34.925 ; 87.953,34.925 v2(92.652,39.624) 99.891,32.385 110.871,32.385
  Bottom Layer w0.5: v2(43.688,69.723) 43.815,69.723 44.831,70.739 v2(50.165,70.739)
  other v2: 71.247,40.513 71.247,42.088 71.247,43.688
CAP+: C14.2 D1.D1+ D2.D1+ D3.D1+ J1.P J2.P J3.P J4.P pad.@89.4,54.2 R2.2
  other v2: 68.072,64.516 68.072,66.167 68.072,67.818 56.7,72.5 56.7,73.698 56.7,75 56.7,76.302
CHARGE_BTN: D4.3 IC1.8 pad.@84.841,40.207 R9.2 S2.1 | length 97.1
  Top Layer w0.3: S2.1 20.32,74.137 20.32,70.231 23.251,67.3 29.8,67.3 35.4,61.7 35.4,52.484 42.164,45.72 v2(65.151,45.72) ; v2(75.692,45.593) 78.867,45.593 81.872,42.588 D4.3 86.868,40.17 R9.2 83.982,40.132 83.067,39.217 IC1.8
  Bottom Layer w0.3: v2(65.151,45.72) 65.215,45.657 75.629,45.657 v2(75.692,45.593)
Collector_1: D2.D1- J2.N pad.12V@45.3,111.6 Q1.2
Collector_2: D3.D1- J3.N pad.12V@153.5,112.8 Q2.2
"D1 +": D1.D1- pad.12V@139.3,54 T1.1
"GATE 1": Q1.1 U1.7 | length 79.7
  Top Layer w0.3: Q1.1 27.305,103.505 23.6,99.8 23.6,95.907 43.408,76.099 49.201,76.099 70.231,55.069 70.231,54.229 69.85,53.848 U1.7
"GATE 2": Q2.1 U1.5 | length 158.7
  Top Layer w0.3: v2(63.5,48.514) 66.294,51.308 U1.5 ; v2(94.488,46.101) 99.314,50.927 122.301,50.927 128.016,56.642 132.207,56.642 138.43,62.865 161.544,62.865 176.149,77.47 176.149,97.282 175.006,98.425 Q2.1
  Bottom Layer w0.3: v2(63.5,48.514) 75.946,48.514 80.899,43.561 91.948,43.561 v2(94.488,46.101)
GND: C1.2 C2.2 C3.2 C4.2 C5.2 C6.2 C7.1 C8.1 C10.1 C11.1 C12.1 C13.2 C14.1 IC1.3 IC1.5 IC1.9 IC1.21 IC2.1 IC2.2 IC2.3 IC3.4 J1.N J4.N J5.7 J5.8 LED1.1 pad.@87.757,18.288 Q1.3 Q2.3 Q3.2 Q3.3 Q4.2 Q4.3 R7.2 R9.1 R15.2 S1.1 S3.1 T1.12 U1.3
  other v1: 75,20 80,20 85,20 90,20 95,20 100,20 105,20 110,20 115,20 120,20 125,20 67.5,25 72.5,25 127.5,25 132.5,25 30,30 35,30 120,30 145,30 165,30 27.5,35 32.5,35 37.5,35 42.5,35 122.5,35 127.5,35 132.5,35 137.5,35 157.5,35 162.5,35 167.5,35 172.5,35 35,40 145,40 150,40 82.5,45 97.5,45 50,50 75,50 90,50 125,50 135,50 140,50 155,50 180,50 47.5,55 132.5,55 152.5,55 157.5,55 182.5,55 155,60 160,60 165,60 170,60 180,60 47.5,65 77.5,65 127.5,65 152.5,65 157.5,65 167.5,65 172.5,65 177.5,65 182.5,65 25,70 140,70 165,70 175,70 180,70 22.5,75 37.5,75 47.5,75 142.5,75 177.5,75 182.5,75 60,80 140,80 145,80 170,80 175,80 180,80 22.5,85 52.5,85 57.5,85 142.5,85 177.5,85 182.5,85 20,90 55,90 140,90 145,90 160,90 170,90 175,90 180,90 22.5,95 57.5,95 142.5,95 172.5,95 177.5,95 140,100 145,100 170,100 175,100 180,100 27.5,105 57.5,105 142.5,105 147.5,105 172.5,105 55,110 65,110 140,110 145,110 165,110 42.5,115 67.5,115 72.5,115 77.5,115 127.5,115 132.5,115 137.5,115 142.5,115 147.5,115 125,120 130,120 135,120 140,120 145,120 150,120 155,120 127.5,125 132.5,125 137.5,125 142.5,125 147.5,125 55,130 60,130 65,130 125,130 130,130 135,130 140,130 145,130 57.5,135 62.5,135 67.5,135 72.5,135 132.5,135 137.5,135 142.5,135 147.5,135 55,140 140,140
  other v2: 25,97.098 25,98.4 26.4,98.598 27.859,99.603 25,99.702 26.4,99.9 27.859,100.905 26.4,101.202 27.859,102.207
KICK_CHARGE: D4.1 J5.6 | length 121.1
  Top Layer w0.3: J5.6 69.693,129.286 75.819,129.286 77.2,127.905 77.2,117.7 73.3,113.8 66,113.8 62.3,110.1 62.3,66.732 79.756,49.276 85.852,49.276 87.818,47.31 D4.1
KICK_CHIP: J5.2 pad.@45.5,52.7 R12.1 | length 81.8
  Top Layer w0.3: R12.1 41.235,52.705 v2(48.387,52.705) ; v2(53.594,85.725) 59.3,91.431 59.3,113.393 J5.2
  Bottom Layer w0.3: v2(48.387,52.705) 53.594,57.912 v2(53.594,85.725)
KICK_DONE: C8.2 IC1.7 J5.5 pad.@83.541,38.207 | length 118.5
  Top Layer w0.3: J5.5 70.299,125.338 70.299,124.9 74.422,120.777 74.422,117.856 72.766,116.2 66.5,116.2 61.3,111 61.3,65.827 73.533,53.594 73.533,44.069 74.93,42.672 v2(78.486,42.672) ; IC1.7 83.18,38.567 83.901,37.846 v2(84.963,37.846) C8.2
  Bottom Layer w0.3: v2(78.486,42.672) 83.312,37.846 v2(84.963,37.846)
KICK_LOW: J5.1 pad.@49.8,51.4 R11.1 | length 83.4
  Top Layer w0.3: pad.@49.8,51.4 51.689,51.4 ; v2(51.689,50.546) 51.689,51.4 ; R11.1 51.689,51.4 ; v2(55.4,85.1) 60.1,89.8 60.1,111.7 68.415,120.015 J5.1
  Bottom Layer w0.3: v2(51.689,50.546) 53.594,50.546 54.2,51.152 54.2,83.9 v2(55.4,85.1)
NetC9_1: C9.1 IC3.5 L1.1 | length 20.6
  Bottom Layer w0.3: IC3.5@99.881,49.981 103.4,53.5 105.5,53.5 106.016,52.984 C9.1 109.084,51.816 113.538,47.362 L1.1
NetC9_2: C9.2 IC3.6 | length 5.7
  Bottom Layer w0.3: IC3.6 101.215,49.399 103.632,51.816 C9.2 C9.2@104.416,52.016
NetIC1_1: IC1.1 R1.1 | length 8.6
  Top Layer w0.3: IC1.1 80.514,34.667 84.828,30.353 R1.1
NetIC1_2: IC1.2 R3.2 | length 7.7
  Top Layer w0.3: IC1.2 82.423,35.317 84.72,33.02 R3.2
NetIC1_4: IC1.4 R4.2 | length 8.1
  Top Layer w0.3: IC1.4 83.171,36.617 83.974,35.814 R4.2
NetIC1_15: IC1.15 R8.1 | length 9.7
  Top Layer w0.3: R8.1 68.494,40.132 70.709,37.917 IC1.15
NetIC1_16: IC1.16 R7.1 | length 8.9
  Top Layer w0.3: R7.1 68.453,37.592 68.778,37.267 IC1.16
NetIC1_18: IC1.18 R6.1 | length 9.3
  Top Layer w0.3: R6.1 68.199,35.433 68.733,35.967 IC1.18
NetIC1_20: IC1.20 R5.1 | length 9.5
  Top Layer w0.3: R5.1 72.271,33.274 73.664,34.667 IC1.20
NetIC3_8: IC3.8 R14.2 R15.1 | length 18.5
  Bottom Layer w0.3: IC3.8 103.087,48.399 R14.2@103.968,49.28 ; R15.1 102.235,36.23 102.235,40.894 103.968,42.627 R14.2@103.968,49.28 ; R14.2 R14.2@103.968,49.28
NetLED1_2: LED1.2 R2.1 | length 8.9
  Top Layer w0.3: R2.1 169.672,76.758 171.958,79.044 LED1.2
NetQ3_1: Q3.1 R11.2 | length 2.4
  Top Layer w0.3: R11.2 Q3.1
NetQ3_4: Q3.4 R10.1 S1.2 U1.2 | length 53.2
  Top Layer w0.3: S1.2 34.877,78.105 39.37,78.105 51.103,66.372 51.141,66.372 51.689,65.824 Q3.4 ; R10.1 49.427,63.207 51.689,65.468 Q3.4 ; U1.2 60.325,53.848 58.801,55.372 58.801,57.912 52.237,64.476 52.237,65.099 Q3.4
NetQ4_1: Q4.1 R12.2 | length 3
  Top Layer w0.3: R12.2 Q4.1 Q4.1@41.656,55.893
NetQ4_4: Q4.4 R13.1 S3.2 U1.4 | length 49.6
  Top Layer w0.3: S3.2 30.864,69.136 36.793,63.207 ; Q4.4 41.148,65.341 39.013,63.207 R13.1 36.793,63.207 ; U1.4 60.706,51.308 56.769,55.245 56.769,57.277 54.346,59.7 37.63,59.7 36.509,60.821 36.509,62.923 36.793,63.207
"NMOS GATE": IC2.4 pad.@59.9,41 R8.2 | length 6.9
  Top Layer w0.3: IC2.4 63.154,41.021 63.918,40.257 R8.2
NMOS_DRAIN: IC2.5 IC2.6 IC2.7 IC2.8 R5.2 R6.2 T1.7 T1.8 T1.9 T1.10
VBAT: C1.1 C2.1 C3.1 C4.1 C5.1 C6.1 C12.2 C13.1 IC3.3 J5.3 J5.4 pad.@101.981,34.544 R1.2 R3.1 T1.3 T1.4 T1.5 T1.6 | length 0.2
  Bottom Layer w0.3: C13.1 C13.1@90.947,54.098
  other v2: 117.856,39.37 119.38,39.37 120.777,39.37 122.301,39.37 117.856,40.97 119.38,40.97 120.777,40.97 122.301,40.97 117.856,42.57 119.38,42.57 120.777,42.57 122.301,42.57 117.856,44.171 119.38,44.171 120.777,44.171 122.301,44.171 117.856,45.771 119.38,45.771 120.777,45.771 122.301,45.771 117.856,47.371 119.38,47.371 120.777,47.371 122.301,47.371
pads on no net: D4.2 IC1.6 IC1.10 IC1.11 IC1.12 IC1.17 IC1.19 IC3.1 IC3.2 IC3.7 J1.S1 J1.S2 J2.S1 J2.S2 J3.S1 J3.S2 J4.S1 J4.S2 J5.9 J5.10 T1.2 T1.11 U1.1 U1.8

## Polygon pours and split planes (outlines as drawn)
"D1 +" on Top Layer "NONET_L-01_P-001" (solid, pour order 39): 145.586,58.586 141.4,54.4 141.4,52.8 140.5,51.9 138.1,51.9 136.5,53.5 136.5,59.411 138.704,61.615 144.385,61.615 145.586,60.414
Collector_1 on Top Layer "NONET_L-01_P-001" (solid, pour order 37): 35.418,106.118 44.7,115.4 46.3,115.4 49.4,112.3 49.4,110.8 40.683,102.083 37.103,102.071
CAP+ on Top Layer "NONET_L-01_P-001" (solid, pour order 34): 70.351,63.239 72.39,65.278 68.79,68.878 67.056,68.878 67.056,63.239
CAP+ on Top Layer "NONET_L-01_P-001" (solid, remove dead copper, pour order 31): 36.276,87.33 36.276,84.755 43.561,77.47 49.657,77.47 59.055,68.072 59.055,75.184 51.689,82.55 46.228,82.55 45.466,83.312 45.466,89.396 38.342,89.396
CAP+ on Top Layer "NONET_L-01_P-001" (solid, remove dead copper, pour order 29): 140.208,65.278 140.335,65.405 140.335,68.707 136.271,68.707 130.81,63.246 127.762,63.246 121.793,57.277 80.391,57.277 70.009,67.659 67.495,64.822 78.613,53.34 122.555,53.34 127.381,58.166 131.572,58.166 138.684,65.278
Collector_1 on Top Layer "NONET_L-01_P-001" (solid, remove dead copper, pour order 22): 48.895,100.584 47.879,101.6 44.831,101.6 43.561,102.87 43.561,106.807 43.434,106.934 34.417,106.934 33.909,106.426 33.909,95.885 34.036,95.758 43.688,95.758 46.101,98.171 48.26,98.171 48.895,98.806
12V on Top Layer "NONET_L-01_P-001" (solid, remove dead copper, pour order 17): 45.72,64.008 45.72,62.738 44.958,61.976 37.719,61.976 37.719,61.087 38.1,60.706 48.514,60.706 48.641,60.833 48.641,61.849 48.514,61.976 47.117,61.976 46.355,62.738 46.355,64.008 46.228,64.135 45.847,64.135
12V on Top Layer "NONET_L-01_P-001" (solid, remove dead copper, pour order 16): 74.93,38.354 74.93,39.37 73.164,39.37 72.771,39.763 72.771,52.07 71.755,53.086 66.802,53.086 66.675,52.959 66.675,52.324 66.929,52.07 69.596,52.07 69.596,39.604 70.846,38.354
NMOS_DRAIN on Top Layer "NONET_L-01_P-001" (solid, remove dead copper, pour order 15): 60.325,35.56 60.325,31.369 63.881,27.813 74.919,27.813 81.261,21.471 119.388,21.471 127.669,29.752 140.623,29.752 144.399,33.528 152.748,33.528 158.971,39.751 168.159,39.751 176.083,39.751 178.181,41.849 178.181,53.467 176.53,55.118 160.655,55.118 158.438,52.901 158.438,44.773 151.965,38.3 144.456,38.3 140.246,34.089 127.131,34.089 118.868,25.825 80.982,25.825 75.565,31.242 65.058,31.242 64.135,32.165 64.135,35.56
CAP+ on Top Layer "NONET_L-01_P-001" (solid, remove dead copper, pour order 11): 148.987,64.659 137.922,64.659 137.922,67.564 139.065,68.707 143.738,68.707 148.064,73.033 154.305,73.033 154.305,69.977
CAP+ on Top Layer "NONET_L-01_P-001" (solid, remove dead copper, pour order 9): 46.228,106.045 47.342,107.159 50.841,107.159 55.6,102.4 55.6,92.363 51.502,88.265 46.228,88.265 46.228,92.311 49.53,95.613 49.53,102.235 48.387,103.378 46.355,103.378 46.228,103.505
CAP+ on Top Layer "NONET_L-01_P-001" (solid, remove dead copper, pour order 8): 37.338,85.344 37.338,87.376 39.976,87.376 49.703,97.103 51.688,97.072 51.688,89.845 50.108,88.265 47.117,88.265 45.974,87.122 44.196,85.344
Collector_1 on Top Layer "NONET_L-01_P-001" (solid, remove dead copper, pour order 7): 37.211,91.948 40.767,91.948 41.021,92.202 41.021,94.996 41.783,95.758 43.561,95.758 43.561,106.553 43.434,106.68 34.163,106.68 33.909,106.426 33.909,95.885 34.036,95.758 36.576,95.758 37.211,95.123
NMOS_DRAIN on Top Layer "NMOS_DRAIN_L01_P006" (solid, remove dead copper, pour order 6): 50.173,42.049 50.117,35.989 55.485,30.621 64.262,30.621 64.262,35.941 63.754,36.449 61.214,36.449 60.325,35.56 55.75,35.56 54.483,36.827 54.483,42.068 53.625,42.926 51.059,42.926
VBAT on Top Layer "NONET_L-01_P-001" (solid, remove dead copper, pour order 5): 145.103,54.679 149.053,54.679 152.1,51.632 152.1,44.6 148.476,40.976 140.925,40.976 137.922,37.973 120.415,37.973 110.776,28.334 89.141,28.334 87.63,29.845 87.63,33.655 87.884,33.909 90.17,33.909 104.902,48.641 141.683,48.641 143.637,50.595 143.637,53.213
"D1 +" on Top Layer "NONET_L-01_P-001" (solid, remove dead copper, pour order 3): 138.684,57.912 148.463,57.912 149.225,58.674 149.225,60.833 148.443,61.615 138.704,61.615 137.668,60.579 137.668,58.928
CAP+ on Top Layer "NONET_L-01_P-001" (solid, remove dead copper, pour order 2): 156.337,98.425 156.337,100.965 155.321,101.981 148.082,101.981 147.32,101.219 147.32,83.82 149.86,81.28 150.622,81.28 153.253,83.911 154.557,86.235 152.019,88.773 152.019,96.52 153.924,98.425
CAP+ on Top Layer "NONET_L-01_P-001" (solid, remove dead copper, pour order 1): 147.32,68.626 151.557,68.626 154.305,71.374 154.305,72.771 156.337,74.803 167.513,74.803 168.529,75.819 168.529,80.391 167.132,81.788 167.132,85.09 164.719,87.503 147.32,87.503
Collector_2 on Top Layer "COLLECTOR_2_L01_P000" (solid, remove dead copper, pour order 0): 161.671,90.043 165.481,90.043 168.783,93.345 168.783,104.6 156.983,116.4 150.561,116.4 148.076,113.915 148.076,106.624 151.703,102.997 157.099,102.997 158.083,102.013 158.083,93.631
GND on Top Layer "GND_L01_P041" (solid, remove dead copper, pour order 41): 462 vertices, not listed, extent 14.84,13.39 186.835,146.562
CAP+ on Top Layer "NONET_L-01_P-001" (solid, pour order 40): 76.938,55.062 78.613,53.387 78.613,53.34 79.86,53.34 82.3,50.9 96,50.9 100.162,55.062
12V on Bottom Layer "12V_L02_P038" (solid, pour order 38): 107.315,34.417 107.332,34.4 118,34.4 118,35.289 114.935,38.354 114.935,39.465 112.7,41.7 110.7,41.7 106.4,46 106.4,50.2 105.4,50.2 105.3,50.1 105.3,40.9 107.315,38.885
12V on Bottom Layer "NONET_L-01_P-001" (solid, remove dead copper, pour order 36): 74.041,44.704 83.693,35.052 86.705,35.052 88.392,36.739 88.392,39.893 89.52,41.021 91.694,41.021 97.366,41.021 98.552,39.835 98.552,35.687 99.822,34.417 107.315,34.417 110.363,37.465 111.252,38.354 114.935,38.354 117.991,35.298 117.991,32.52 116.332,30.861 75.071,30.861 68.685,37.246 68.685,43.158 70.231,44.704
CAP+ on Bottom Layer "NONET_L-01_P-001" (solid, pour order 32): 55.8,71.327 63.881,63.246 70.993,63.246 72.707,64.96 68.834,68.834 65.405,68.834 56.388,77.851 55.8,77.851
VBAT on Bottom Layer "NONET_L-01_P-001" (solid, remove dead copper, pour order 28): 89.916,55.118 89.916,53.213 100.965,53.213 102.235,54.483 110.363,54.483 116.713,48.133 116.713,38.735 117.461,37.987 123.331,37.987 123.698,38.354 123.698,48.768 123.571,48.895 115.57,56.896 91.694,56.896
VBAT on Bottom Layer "NONET_L-01_P-001" (solid, remove dead copper, pour order 24): 91.694,53.213 91.694,56.896 75.311,56.896 70.739,61.468 60.579,61.468 57.531,58.42 57.531,52.852 52.431,47.752 46.355,47.752 39.911,41.308 46.418,34.8 57.479,34.8 61.595,38.916 61.595,50.987 86.581,51.102 88.691,53.213
VBAT on Bottom Layer "NONET_L-01_P-001" (solid, remove dead copper, pour order 21): 63.651,120.574 62.025,122.2 51.54,122.2 24.765,95.425 24.765,72.009 27.559,69.215 31.75,69.215 38.1,62.865 38.1,43.118 44.148,37.07 50.783,43.705 41.91,52.578 41.91,67.564 34.29,75.184 34.29,94.742 50.672,111.124 57.759,111.124 63.651,117.016
12V on Bottom Layer "NONET_L-01_P-001" (solid, remove dead copper, pour order 18): 70.104,39.116 69.596,39.624 69.596,44.069 70.231,44.704 72.136,44.704 72.771,44.069 72.771,39.116 72.771,43.053 72.771,39.116
12V on Bottom Layer "NONET_L-01_P-001" (solid, remove dead copper, pour order 10): 110.109,30.861 116.332,30.861 116.459,30.988 116.459,33.655 115.316,34.798 115.316,37.084 115.062,37.338 112.014,37.338 111.76,37.084 111.76,35.103 110.109,33.782
GND on Bottom Layer "GND_L02_P042" (solid, remove dead copper, pour order 42): 462 vertices, not listed, extent 14.84,13.39 186.835,146.562
12V on Bottom Layer "NONET_L-01_P-001" (solid, remove dead copper, pour order 20): 112.141,36.703 109.982,34.163 108.458,32.639 108.458,32.131 109.728,30.861 110.744,30.861 111.125,31.242 111.76,31.242 111.76,33.909
VBAT on Bottom Layer "NONET_L-01_P-001" (solid, pour order 25): 61.468,49.403 61.468,49.53 63.5,51.562 68.834,51.562 69.85,52.578 69.85,56.007 68.58,57.277 60.96,57.277 59.182,55.499 59.182,50.546 60.325,49.403
VBAT on Bottom Layer "NONET_L-01_P-001" (solid, remove dead copper, pour order 27): 97.155,49.53 98.425,49.53 98.425,49.276 95.504,49.276 92.71,52.07 91.567,53.213 89.916,53.213 89.916,55.118 95.885,55.118 95.885,50.8

## Silkscreen, mask and mechanical layers (free items; w line width, h text height)
Top Overlay:
  drawing of 4 lines, arcs and shapes, not listed
  text "KICKER 2024" at 129.151,121.556 h3
  text "COLL_2" at 151.6,116.325 h1.27
  text "COLL_1" at 43.7,114.825 h1.27
  text "12V" at 19.4,93.4 h1.27 r270
  text "LOW" at 24.913,88.5 h1.27 r270
  text "CRG" at 17.713,84.8 h1.27 r270
  text "CHIP" at 23.113,70.7 h1.27 r270
  text "CHIP" at 44.5,51.111 h1
  text "D1+" at 138.3,49.7 h1.27
  text "LOW" at 48.6,49.611 h1
  text "CAP+" at 88.3,49.614 h1.27
  text "NMOS_GATE" at 57.6,42.478 h1
  text "CHARGE" at 83.1,41.211 h1
  text "DONE" at 82,36.311 h1
  text "VBAT" at 100.514,30.091 h1.27
  text "GND" at 90.543,17.913 h1.27
Bottom Overlay:
  drawing of 3 lines, arcs and shapes, not listed
  text "Thanks" at 165.646,63.054 h1.52
  text "Cap Azevedo" at 165.646,59.662 h1.52
  text "Pink Paul" at 165.746,56.254 h1.52
Mechanical 1:
  drawing of 461 lines, arcs and shapes, not listed